# EAGLE board lau_ard8pin.1 (EAGLE 9.6.2)
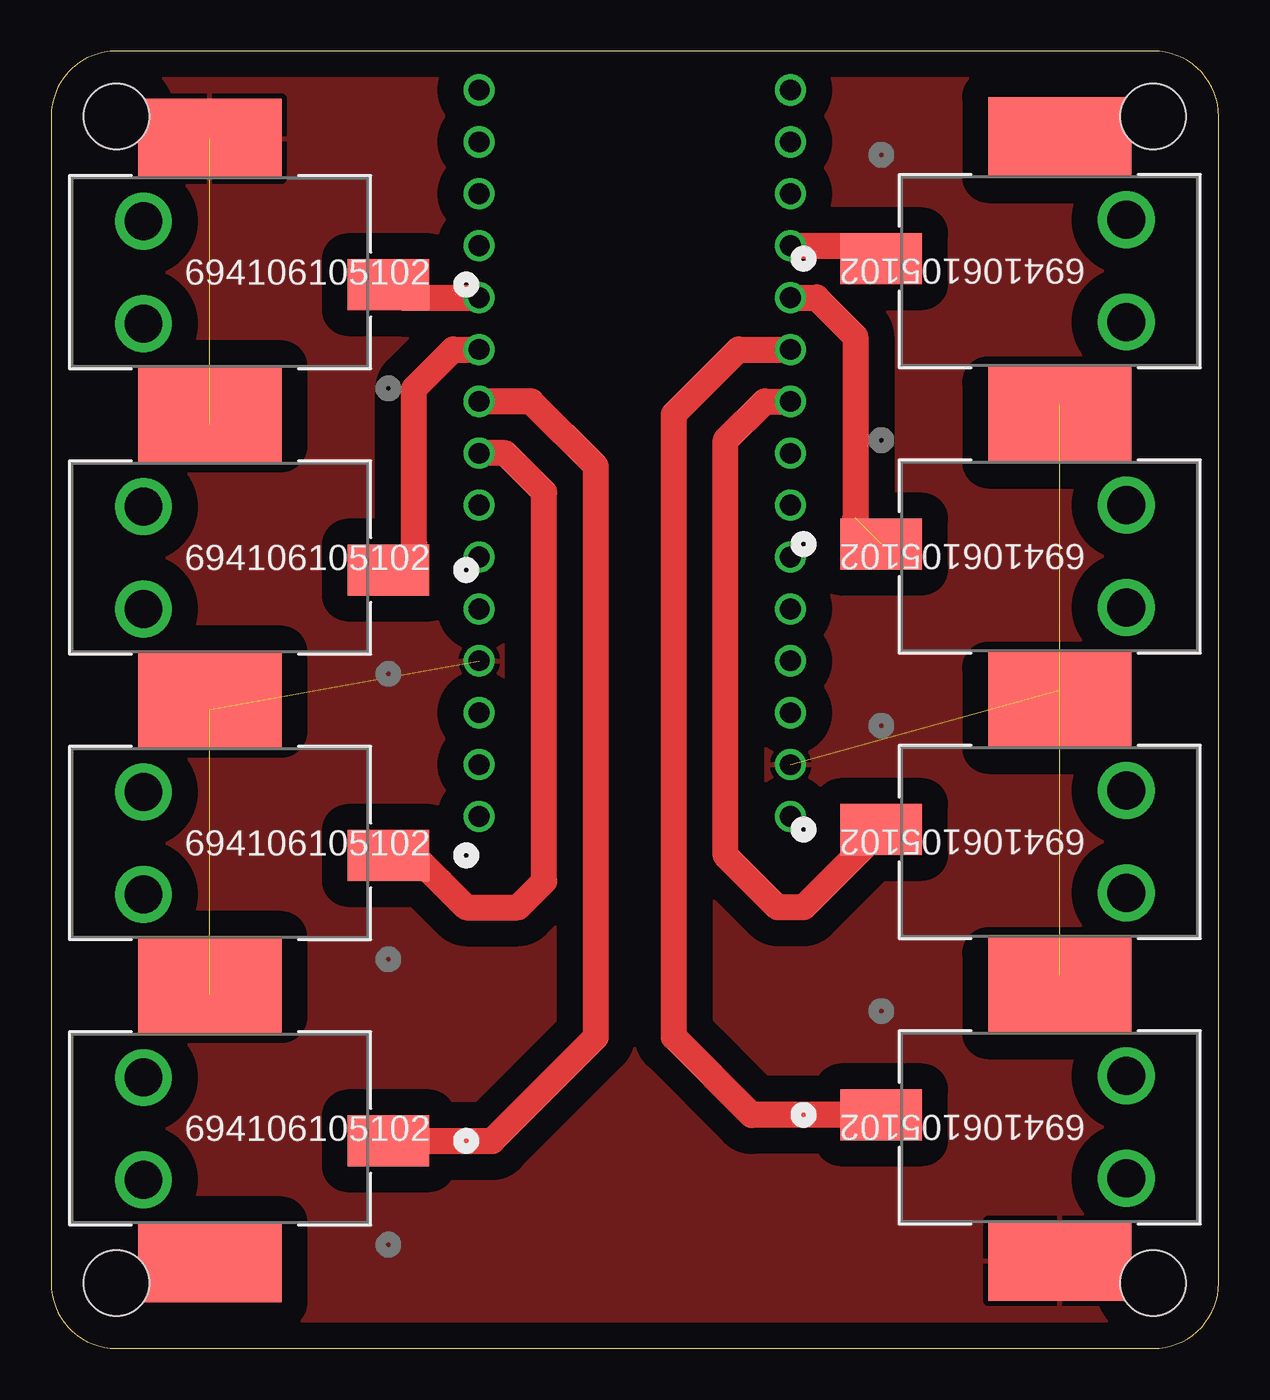
[diagram p0: board, top side]
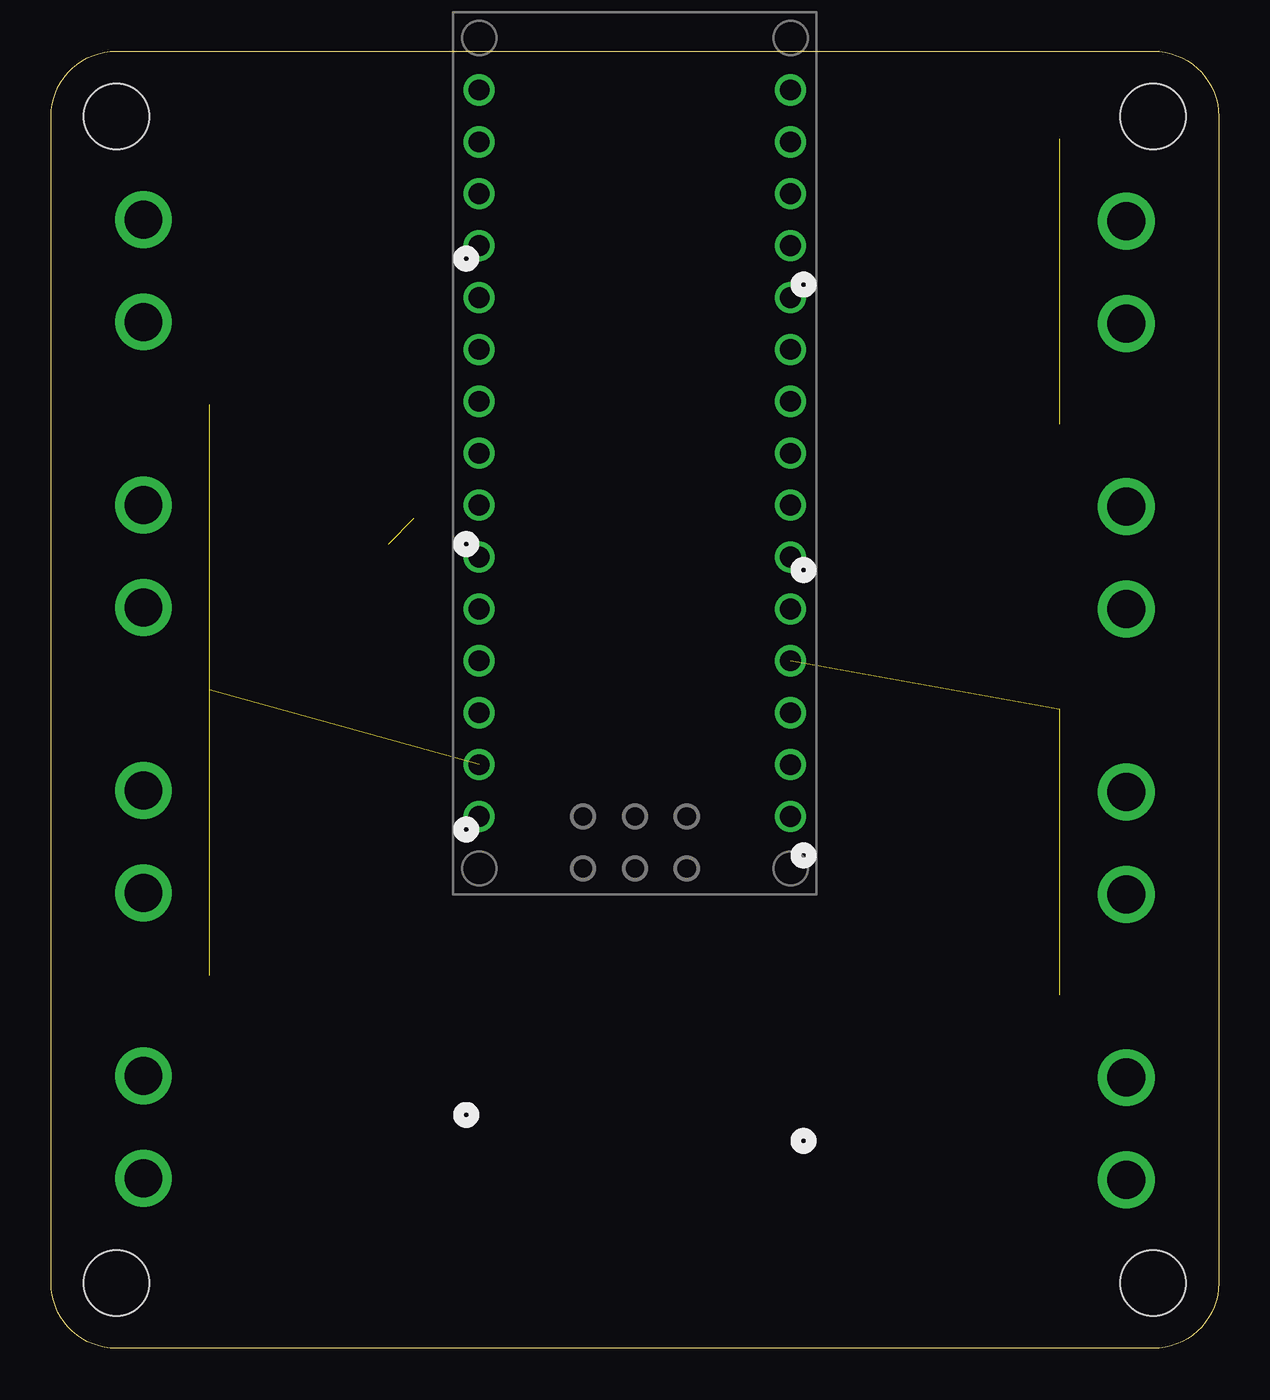
[diagram p1: board, bottom side, seen from below]

Size 57.15 x 63.5 mm. Coordinates in mm from the lower left corner, seen from the top.
Outline: 0,60.3 0,3.2 arc90 3.2,0 53.95,0 arc90 57.15,3.2 57.15,60.3 arc90 53.95,63.5 3.2,63.5 arc90 0,60.3
Copper layers (1*16): Top 0.035mm / dielectric 1.5mm / Bottom 0.035mm
Design rules "default": minimum track width 6mil, minimum drill 0.35mm, track to track 6mil, track to pad 6mil, pad to pad 6mil, via to via 6mil, smd to smd 6mil, copper to edge 40mil, drill to drill 6mil, minimum pad ring 10mil, minimum via ring 8mil, stop-mask expansion 4mil, vias tented up to drill 0mil, thermal gap 10mil
Holes 3.2 mm at 3.2,3.2 53.95,3.2 53.95,60.3 3.2,60.3

## Footprints (pad centres in the part's own frame; a part is rotated, then mirrored left to right if it is on the bottom)
NANO = drill 1.016: 1 -7.62,17.78; 2 -7.62,15.24; 3 -7.62,12.7; 4 -7.62,10.16; 5 -7.62,7.62; 6 -7.62,5.08; 7 -7.62,2.54; 8 -7.62,0; 9 -7.62,-2.54; 10 -7.62,-5.08; 11 -7.62,-7.62; 12 -7.62,-10.16; 13 -7.62,-12.7; 14 -7.62,-15.24; 15 -7.62,-17.78; 16 7.62,-17.78; 17 7.62,-15.24; 18 7.62,-12.7; 19 7.62,-10.16; 20 7.62,-7.62; 21 7.62,-5.08; 22 7.62,-2.54; 23 7.62,0; 24 7.62,2.54; 25 7.62,5.08; 26 7.62,7.62; 27 7.62,10.16; 28 7.62,12.7; 29 7.62,15.24; 30 7.62,17.78
CONN3_06105102_WRE = smd 3.988 x 2.489: 1 0,0 | smd 7.01 x 3.912: 2 -8.739,7.15; 3 -8.739,-5.95 | drill 1.854 pad 2.362: 4 -11.989,3.099; 5 -11.989,-1.905

## Placement (x,y rotation side)
J1  NANO_FOOTPRINT  [NANO]  28.57,43.81 180 bottom
J2  694106105102  [CONN3_06105102_WRE]  16.51,24.13 0 top
J3  694106105102  [CONN3_06105102_WRE]  16.51,10.16 0 top
J4  694106105102  [CONN3_06105102_WRE]  16.51,38.1 0 top
J5  694106105102  [CONN3_06105102_WRE]  16.51,52.07 0 top
J6  694106105102  [CONN3_06105102_WRE]  40.64,25.4 180 top
J7  694106105102  [CONN3_06105102_WRE]  40.64,11.43 180 top
J8  694106105102  [CONN3_06105102_WRE]  40.64,39.37 180 top
J9  694106105102  [CONN3_06105102_WRE]  40.64,53.34 180 top

## Library data of the parts
J1 = SparkFun-Boards
J2-J9 = connector; COPYRIGHT: Copyright (C) 2022 Ultra Librarian. All rights reserved.; DIGI-KEY_PART_NUMBER_1: 732-5928-2-ND; DIGI-KEY_PART_NUMBER_2: 732-5928-1-ND; DIGI-KEY_PART_NUMBER_3: 732-5928-6-ND; MANUFACTURER_PART_NUMBER: 694106105102; MFR_NAME: Wurth Electronics

## Nets
GND: J1.4 J1.29 J2.2 J3.2 J4.2 J5.2 J6.2 J7.2 J8.2 J9.2
N$1: J1.8 J2.1
N$2: J1.9 J3.1
N$3: J1.10 J4.1
N$4: J1.11 J5.1
N$5: J1.19 J9.1
N$6: J1.20 J8.1
N$7: J1.21 J7.1
N$8: J1.22 J6.1

## Tracks (layer width: path | path; a pad name or v marks a point on that pad's centre or on a via)
GND  (6 unrouted)
  pour Top (isolate 1.27): -8.89,-6.35 54.55,-6.35 arc45 56.82,-5.41 58.42,-3.81 58.75,-3.48 arc45 59.69,-1.21 59.69,62.23 56.82,65.1 arc45 54.55,66.04 52.07,66.04 1.33,66.04 arc45 -0.94,65.1 -2.54,63.5 -7.95,58.09 arc45 -8.89,55.82
N$1
  Top 0.152: J2.1 17.78,24.13
  Top 1.27: 17.78,24.13 19.05,22.86 20.32,21.59 22.86,21.59 24.13,22.86 24.13,41.91 22.23,43.81 J1.8
N$2
  Top 1.27: J3.1 21.59,10.16 26.67,15.24 26.67,43.18 23.5,46.35 J1.9
N$3
  Top 0.152: J4.1 17.78,39.37
  Top 1.27: 17.78,39.37 17.78,46.99 19.68,48.9 J1.10
N$4
  Top 0.152: J5.1 17.14,51.44
  Top 1.27: 17.14,51.44 J1.11
N$5
  Top 0.152: 40.01,53.98 J9.1
  Top 1.27: J1.19 40.01,53.98
N$6  (1 unrouted)
  Top 0.152: J8.1 40.01,38.73
  Top 1.27: J1.20 37.47,51.44 39.37,49.53 39.37,40.64
N$7
  Top 1.27: J7.1 34.29,11.43 30.48,15.24 30.48,45.72 33.66,48.9 J1.21
N$8
  Top 1.27: J6.1 36.83,21.59 35.56,21.59 33.02,24.13 33.02,44.45 34.92,46.35 J1.22